# Altium PCB ROV_Filter.PcbDoc
Units mm, origin at the board's own origin, x right, y up, seen from the top; angles counter-clockwise.
Board outline 55 x 107 mm, 2 copper layers (Top Layer, Bottom Layer); 14 components, 7 nets, 28 pads, 0 vias.
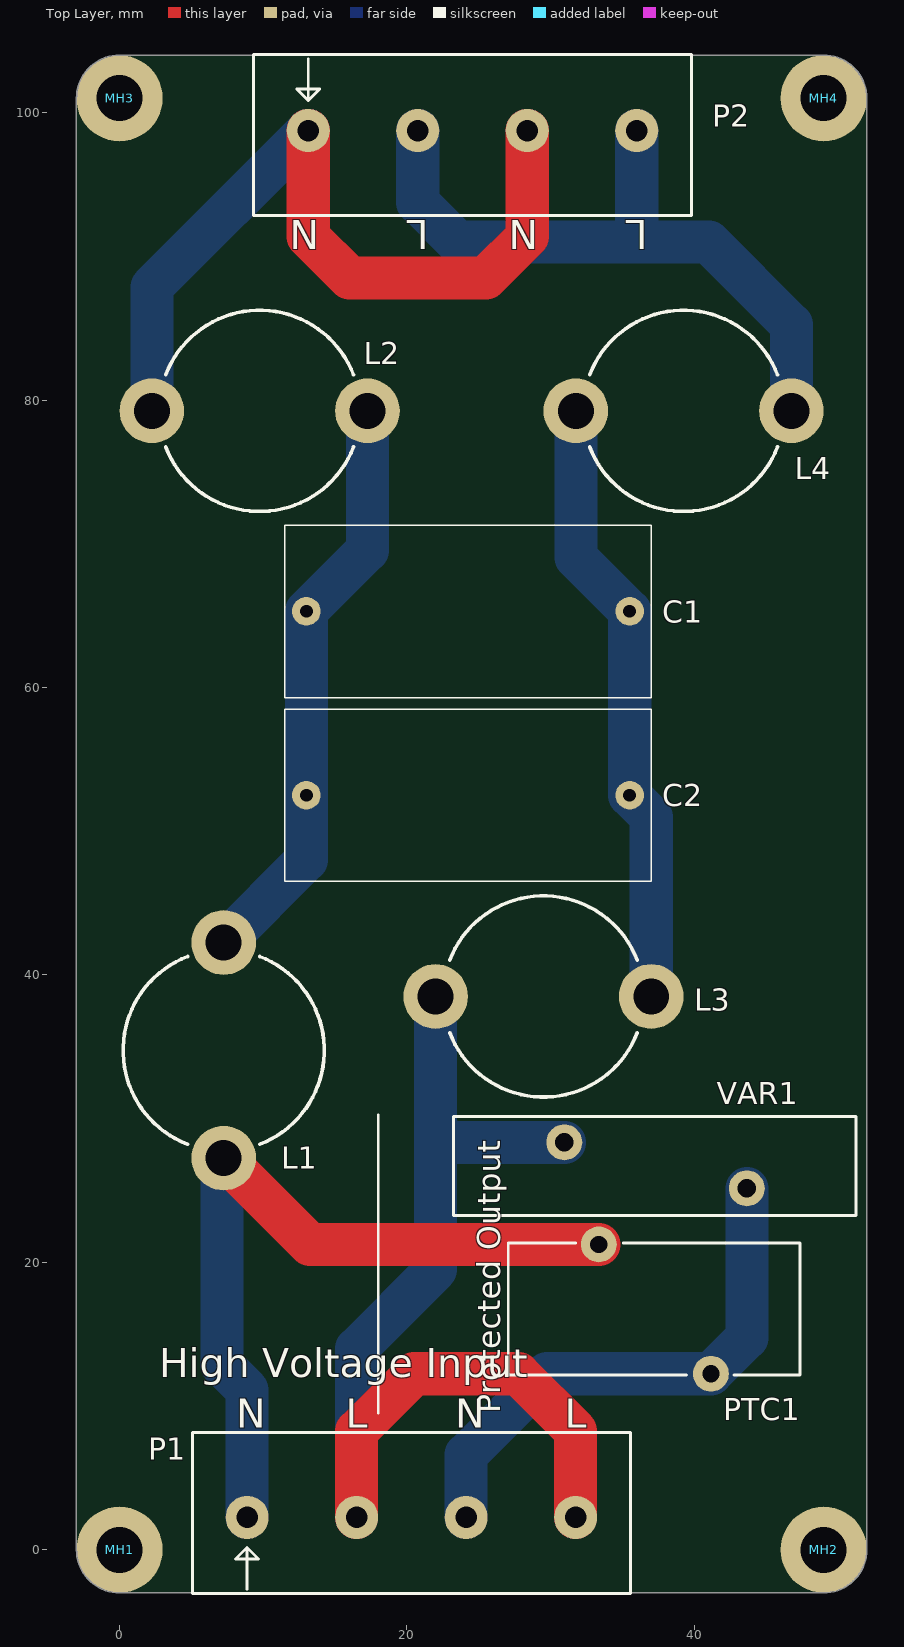
[diagram p0: Top Layer view]
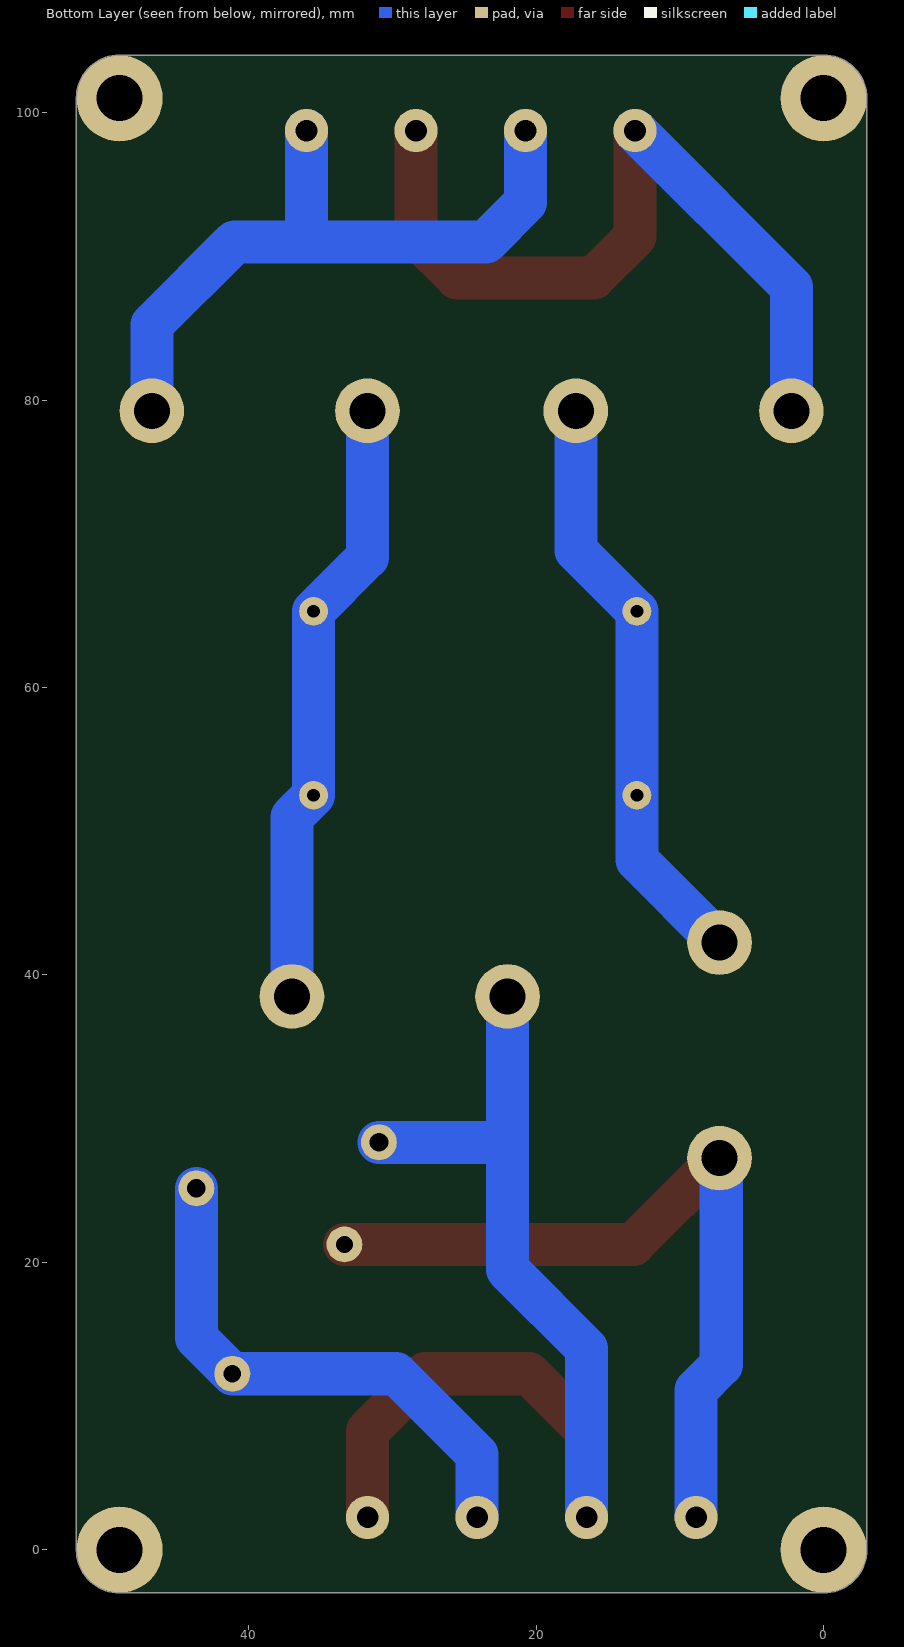
[diagram p1: Bottom Layer view, seen from below]

## Layer stack, top to bottom
Top Solder: solder mask 0.0102, Solder Resist, Dk 3.5
Top Layer: signal copper 0.0356
Dielectric 1: dielectric 0.32, FR-4, Dk 4.8
Bottom Layer: signal copper 0.0356
Bottom Solder: solder mask 0.0102, Solder Resist, Dk 3.5

## Board outline
-3,0 -3,101 cw(c0,101) 0,104 49,104 cw(c49,101) 52,101 52,0 cw(c49,0) 49,-3 0,-3 cw(c0,0)

## Design rules (kind name [scope] priority, off if disabled: settings)
Clearance [All] p1: gap=2 ignorepadtopadclearanceinfootprint=FALSE
Height [All] p1: minheight=0 maxheight=50 prefheight=12.7
HoleSize [All] p1: absolutevalues=TRUE maxlimit=6 minlimit=0.025 maxpercent=80.000 minpercent=20.000
PolygonConnect [All] p1: connectstyle=Relief reliefconductorwidth=0.254 reliefentries=4 polygonreliefangle="90 Angle" airgapwidth=0.254
RoutingVias [All] p1: holewidth=0.711 width=1.27 viastyle="Through Hole" minholewidth=0.711 minwidth=1.27 maxholewidth=0.711 maxwidth=1.27
SilkToSilkClearance [All] p1: silktosilkclearance=0.1
SilkToSolderMaskClearance [IsPad] p1: minsilkscreentomaskgap=0.1 clearancetoexposedcopper=TRUE
SolderMaskExpansion [All] p1: expansion=0.102
Width [All] p1: maxlimit=5 minlimit=0.254 preferedwidth=0.254
26 further rules are at their usual default settings.

## Classes and differential pairs
component class [1]ROV_Filter: C1 C2 L1 L2 L4 MH1 MH2 MH3 MH4 P1 P2 PTC1 VAR1

## Components (designator, comment, footprint, x,y, rotation, side; value= is the part's Value field where it differs from the comment)
C1 "0603" "ECWFD Cap Straight Type" 24.5,65.302 r180 top value=2.2uF/630V
C2 "0603" "ECWFD Cap Straight Type" 24.5,52.5 r180 top value=N.F.
L1 "PCV-2-104-10L" PCV-2 7.25,34.75 r90 top value="100 µH"
L2 "PCV-2-104-10L" PCV-2 9.75,79.25 r180 top value="100 µH"
L3 "PCV-2-104-10L" PCV-2 29.5,38.5 r0 top value="100 µH"
L4 "PCV-2-104-10L" PCV-2 39.25,79.25 r0 top value="100 µH"
MH1 "Mouting Hole" "M3 Mounting Hole" 0,0 r0 top
MH2 "Mouting Hole" "M3 Mounting Hole" 49,0 r0 top
MH3 "Mouting Hole" "M3 Mounting Hole" 0,101 r0 top
MH4 "Mouting Hole" "M3 Mounting Hole" 49,101 r0 top
P1 "1930218" "Phoenix Contact 1930218" 8.88,2.25 r0 top
P2 "1930218" "Phoenix Contact 1930218 REVERSED" 35.99,98.75 r180 top
PTC1 "MCL20 500100-A" "MCL20 PTC" 37.25,16.75 r180 top
VAR1 "V25S300P" "UltraMOV 25S Varistor Series" 37.25,26.75 r0 top

## Footprints (in the part's own frame and the unit in brackets; to place one, negate y for a bottom-side part, rotate by r counter-clockwise, add the part's x,y. Pads: shape width x height; smd on the part's side, far side on the other; paste and mask are expansions set on the pad)
"ECWFD Cap Straight Type" [mm]
  round 2 hole 0.9: 1(-11,0) 2(11.5,0)
  silkscreen extent -12.5,-6 13,6, body extent -12,-5.5 12.5,5.5, height 16
"M3 Mounting Hole" [mm]
  round 6 hole 3.2: 1(0,0)
"MCL20 PTC" [mm]
  round 2.5 hole 1.2: 1(-3.9,4.5) 2(3.9,-4.5)
  silkscreen extent -10.1,-4.6 10.2,4.6, body extent -10,-4.5 10,4.5, height 25
PCV-2 [mm]
  round 4.5 hole 2.5: 1(-7.5,0) 2(7.5,0)
  silkscreen extent -6.53,-7 6.53,7, body extent -7,-7 7,7, height 38
"Phoenix Contact 1930218" [mm]
  round 3 hole 1.5: 1(0,0) 2(7.62,0) 3(15.24,0) 4(22.86,0)
  silkscreen extent -3.81,-5.3 26.67,5.91, body extent -4.41,-5.5 26.65,5.7, height 18.31
"Phoenix Contact 1930218 REVERSED" [mm]
  round 3 hole 1.5: 1(22.86,0) 2(15.24,0) 3(7.62,0) 4(0,0)
  silkscreen extent -3.81,-5.3 26.67,5.91, body extent -4.41,-5.5 26.65,5.7, height 18.31
"UltraMOV 25S Varistor Series" [mm]
  round 2.5 hole 1.3: 1(-6.3,1.6) 2(6.4,-1.6)
  silkscreen extent -14,-3.5 14,3.4, body extent -14,-3.5 14,3.4, height 32

## Part data
C1 C2: library part Cap, "Capacitor", Case Code (in)="ECWFD Cap Straight Type", LatestRevisionDate=17-Jul-2002, LatestRevisionNote="Re-released for DXP Platform.", Note="We have them in Bulgaria", PackageDescription="Radial Cap, Thru-Hole; 2 Leads; 0.3 in Pin Spacing", PackageReference=RAD-0.3, Published=8-Jun-2000, Publisher="Altium Limited"
L1 L2 L3 L4: library part Inductor, "Inductor", Code_IEC=1005, Code_JEITA=0402, LatestRevisionDate=29-May-2009, LatestRevisionNote="IPC-7351 Footprint Added.", Note="We have them in Bulgaria", PackageDescription="Chip Inductor", PackageReference=0402-A, Published=8-Jun-2000, Publisher="Altium Limited"
P1 P2: library part "Header 4", "Header, 4-Pin", Manufacturer Name="Phoenix Contact", Distributor Link=https://eu.mouser.com/ProductDetail/Phoenix-Contact/1930218?qs=ur4COD7pGFv5LOzi9Ltyeg==, LatestRevisionDate=17-Jul-2002, LatestRevisionNote="Re-released for DXP Platform.", Manufacturer Part No.=1930218, Publisher="Altium Limited"
PTC1 VAR1: library part "Res Varistor", "Varistor (Voltage-Sensitive Resistor)", Code_IPC=RESC2012, LatestRevisionDate=29-May-2009, LatestRevisionNote="IPC-7351 Footprint Added.", PackageDescription="Chip Resistor 0805 Case Size", PackageReference=6-0805, PackageVersion=Mar-2003, Published=24-Mar-1999, Publisher="Altium Limited"

## Nets (pads, with @x,y where several pads share a name; then routed paths per layer and width w, separated by ;. In a path a pad name is that pad's centre, name@x,y a point inside that pad or via, vN(x,y) a via of type N, cw(c..) or ccw(c..) an arc to the next point about the centre after c; other vN are vias at no path point)
NetC1_1: C1.1 C2.1 L3.2 L4.1 | length 42.9
  Bottom Layer w3: L4.1 31.75,69.052 C1.1 C2.1 37,51 L3.2
NetC1_2: C1.2 C2.2 L1.2 L2.1 | length 41.1
  Bottom Layer w3: L1.2 13,48 C2.2 C1.2 17.25,69.552 L2.1
NetL1_1: L1.1 P1.1 PTC1.2 | length 54.4
  Top Layer w3: L1.1 13.25,21.25 PTC1.2
  Bottom Layer w3: L1.1 7.13,27.13 7.13,12.87 8.88,11.12 P1.1
NetL2_2: L2.2 P2.1 P2.3 | length 56.4
  Top Layer w3: P2.1 13.13,91.37 16,88.5 25.5,88.5 28.37,91.37 P2.3
  Bottom Layer w3: L2.2 2.25,87.87 P2.1
NetL3_1: L3.1 P1.2 P1.4 VAR1.1 | length 78.4
  Top Layer w3: P1.2 16.5,8.25 20.5,12.25 27.75,12.25 31.74,8.26 P1.4
  Bottom Layer w3: P1.2 16.5,14 22,19.5 22,29.25 ; L3.1 22,29.25 ; VAR1.1 22.9,28.35 22,29.25
NetL4_2: L4.2 P2.2 P2.4 | length 48.6
  Bottom Layer w3: P2.2 20.75,93.75 23.5,91 36.75,91 ; P2.4 35.99,91.76 36.75,91 ; L4.2 46.75,85.25 41,91 36.75,91
NetP1_3: P1.3 PTC1.1 VAR1.2 | length 37.7
  Bottom Layer w3: P1.3 24.12,6.62 29.75,12.25 PTC1.1 43.65,14.75 VAR1.2
pads on no net: MH1.1 MH2.1 MH3.1 MH4.1

## Silkscreen, mask and mechanical layers (free items; w line width, h text height)
Top Overlay:
  lines w0.2: 18,9.5 18,30.25
  text "N" at 13.89,92.5 h2 r180
  text "L" at 21.51,92.5 h2 r180
  text "N" at 29.13,92.5 h2 r180
  text "L" at 36.75,92.5 h2 r180
  text "High Voltage Input" at 2.75,12 h2
  text "Protected Output" at 26.5,9.5 h1.6 r90
  text "N" at 8.12,8.5 h2
  text "L" at 15.74,8.5 h2
  text "N" at 23.36,8.5 h2
  text "L" at 30.98,8.5 h2
Mechanical 4:
  the board outline again, w0.1
  text "Board Outline" at 7.25,104.75 h1.52
Mechanical 20 (Mech20):
  text "Board Info Layer: / - SIze - 55mm x 107mm / - Layer Count - 2 / - Copper Thickness - 1oz / - Finish - HASL (With lead)  / - PCB Color - green" at 58.4,69.8 h1.52